# Altium PCB ISD1820PY 10秒录音器电路图.PcbDoc
Units mil, origin at the board's own origin, x right, y up, seen from the top; angles counter-clockwise.
Board outline 1575 x 1180 mil, 2 copper layers (Top Layer, Bottom Layer); 19 components, 17 nets, 62 pads, 1 vias.
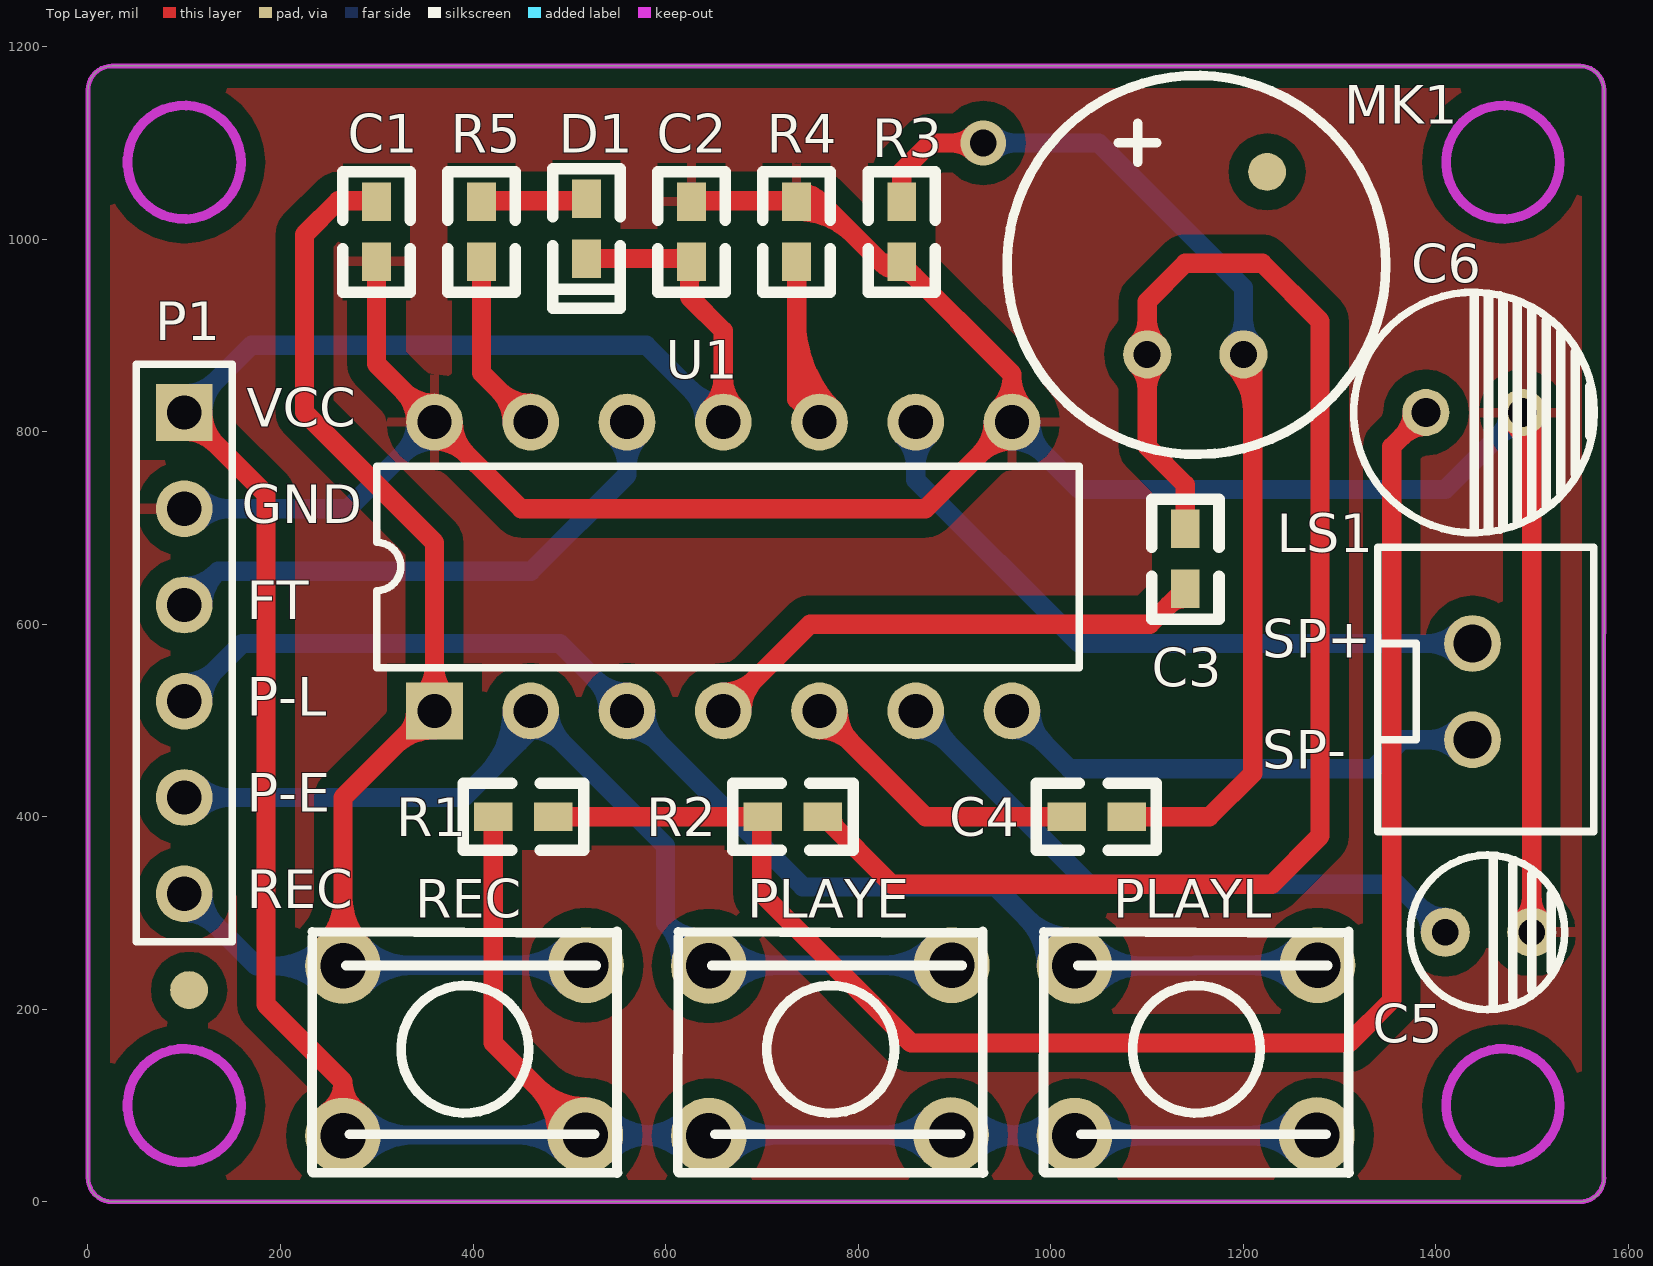
[diagram p0: Top Layer view]
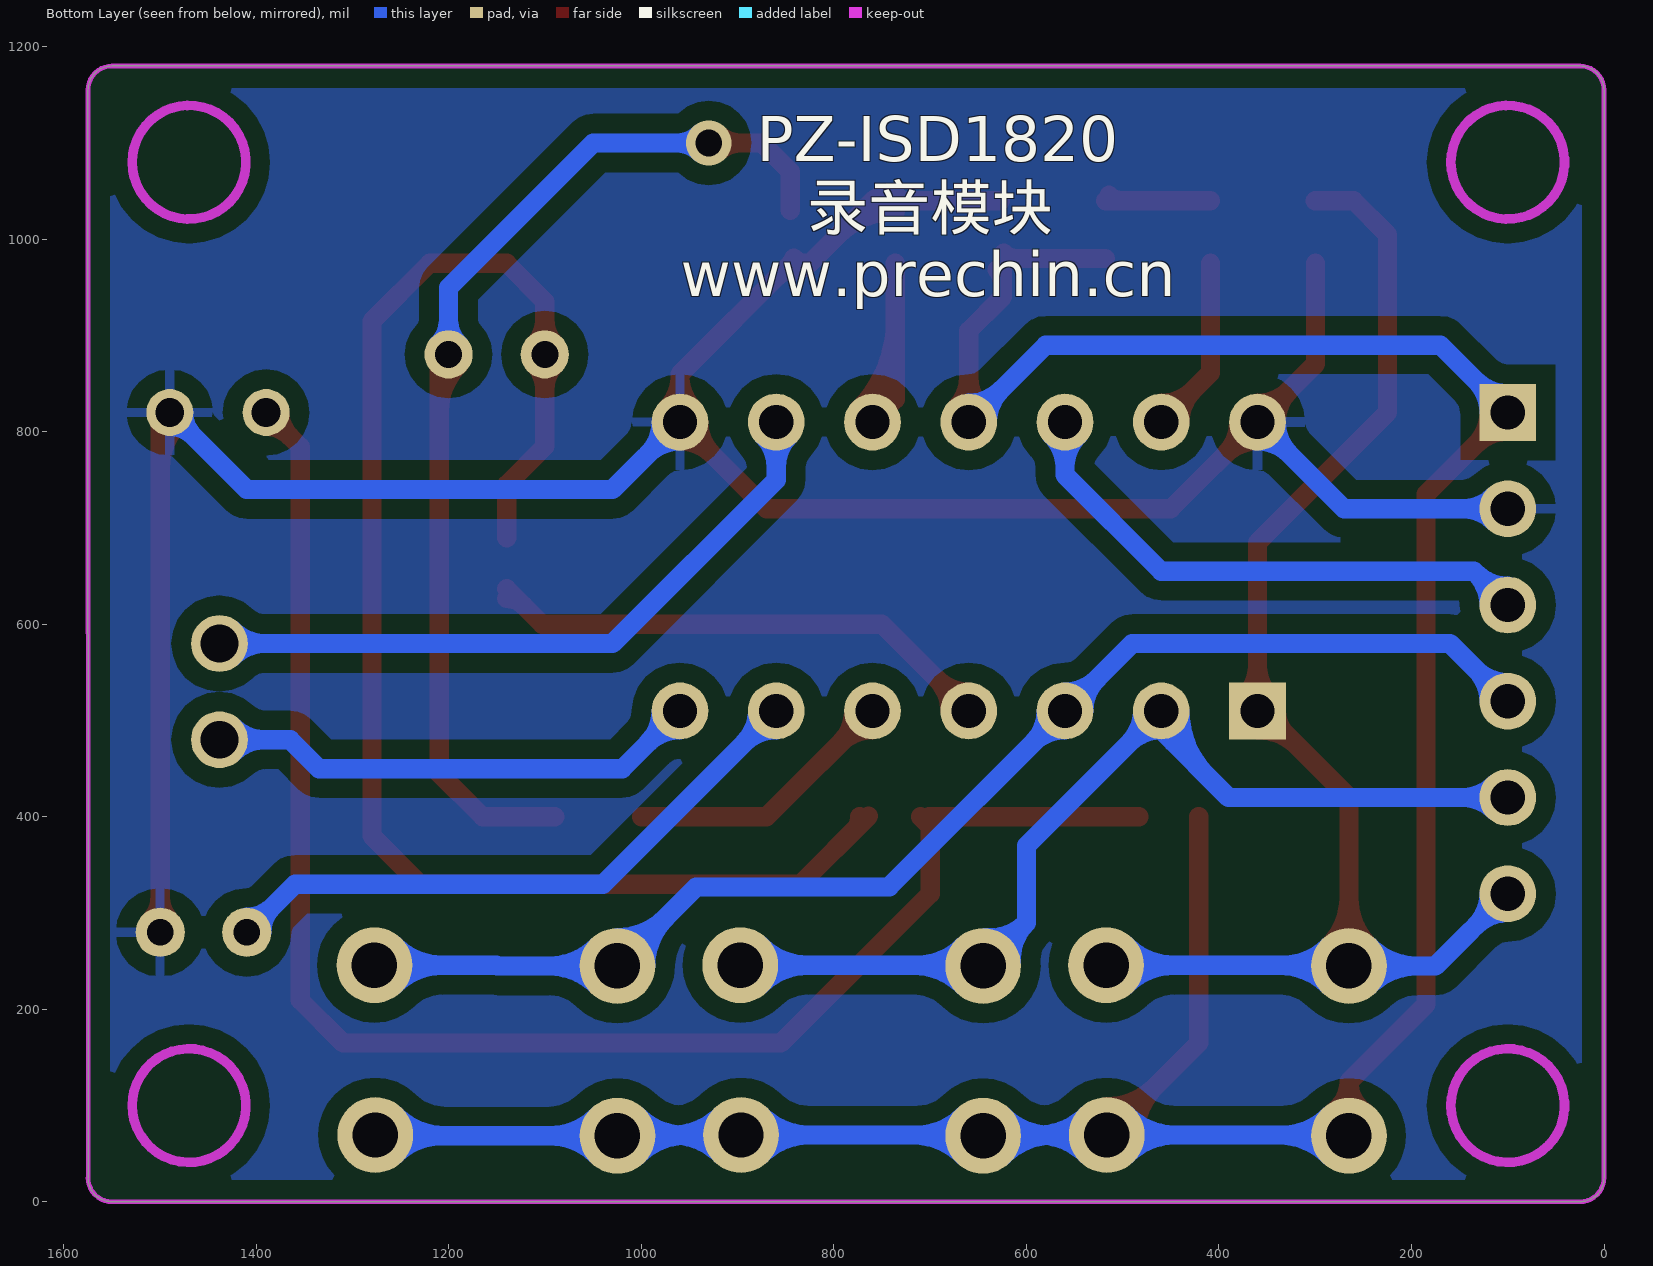
[diagram p1: Bottom Layer view, seen from below]

## Layer stack, top to bottom
Top Layer: signal copper 1.4
Dielectric: dielectric 12.6, FR-4, Dk 4.8
Bottom Layer: signal copper 1.4

## Board outline
25,0 cw(c25,25) 0,25 0,1155 cw(c25,1155) 25,1180 1550,1180 cw(c1550,1155) 1575,1155 1574.8,25 1575,25 cw(c1550,25) 1550,0

## Design rules (kind name [scope] priority, off if disabled: settings)
Clearance [All] p1: gap=20
ComponentClearance [All] p1: gap=0 collisioncheckmode=3 verticalgap=10 showdistances=FALSE
HoleToHoleClearance [All] p1: gap=0 allowstackedmicrovias=TRUE
MinimumSolderMaskSliver [All] p1: minsoldermaskwidth=0
PolygonConnect [All] p1: connectstyle=Relief reliefconductorwidth=10 reliefentries=4 polygonreliefangle="90 Angle"
RoutingVias [All] p1: holewidth=28 width=50 viastyle="Through Hole" minholewidth=28 minwidth=50 maxholewidth=28 maxwidth=50
SilkToSilkClearance [All] p1: silktosilkclearance=0
SilkscreenOverComponentPads [All] p1: minsilkscreentomaskgap=0
SolderMaskExpansion [All] p1: expansion=4
TestPointUsage [All] p1: valid=0 allowmultiple=FALSE
Testpoint [All] p1: side=15 testpointundercomponent=TRUE minsize=40 maxsize=100 preferedsize=60 minholesize=0 maxholesize=40 preferedholesize=32 testpointgrid=1 style=1023 order=0-112345678
Width [All] p1: maxlimit=50 minlimit=15 preferedwidth=20
19 further rules are at their usual default settings.

## Components (designator, comment, footprint, x,y, rotation, side; value= is the part's Value field where it differs from the comment)
C1 "Cap" 0603 299.62,980 r90 top
C2 "Cap" 0603 627.08,980 r90 top
C3 "Cap" 0603 1140,640 r90 top
C4 "Cap" 0603 1020,400 r0 top
C5 "Cap Pol2" CD4 1460,280 r180 top
C6 "Cap Pol2" CD6 1440,820 r90 top
D1 "LED" LED0603 517.92,980 r90 top
LS1 "Speaker" JXZ1 1340,680 r270 top
MK1 "Mic2" MIC 1100,880 r0 top
P1 "Header 6" HDR1X6 100,820 r270 top
PLAYE "JZ-SW2" JZ-SW2 645,245 r0 top (schematic designator K2)
PLAYL "JZ-SW2" JZ-SW2 1025,245 r0 top (schematic designator K3)
R1 "Res2" 0603 480,400 r180 top
R2 "Res2" 0603 760,400 r180 top
R3 "Res2" 0603 845.38,980 r90 top
R4 "Res2" 0603 736.23,980 r90 top
R5 "Res2" 0603 408.77,980 r90 top
REC "JZ-SW2" JZ-SW2 265,245 r0 top (schematic designator K1)
U1 "ISD1820" DIP-14 660,660 r0 top

## Footprints (in the part's own frame and the unit in brackets; to place one, negate y for a bottom-side part, rotate by r counter-clockwise, add the part's x,y. Pads: shape width x height; smd on the part's side, far side on the other; paste and mask are expansions set on the pad)
0603 [mil]
  rect 40x30 smd: 1(-3.15,0) 2(59.06,0)
  silkscreen extent -35,-35 90,35, body extent -41,-41 96,41, height 50
CD4 [mm]
  round 1.3 hole 0.7: 1(1.27,0) 2(-1.016,0)
  silkscreen extent -1.89,-2.04 2.19,2.04, body extent -1.99,-2.14 2.3,2.14, height 1.27
CD6 [mm]
  round 1.24 hole 0.762: 1(0,1.27) 2(0,-1.27)
  silkscreen extent -3.17,-3.17 3.17,3.17, body extent -2.62,-2.62 2.62,2.62, height 1.27
DIP-14 [mm] "DIP; 14 Leads; Row Spacing 7.62 mm; Pitch 2.54 mm"
  rect 1.5x1.5 hole 0.9: 1(-7.62,-3.81)
  round 1.5 hole 0.9: 2(-5.08,-3.81) 3(-2.54,-3.81) 4(0,-3.81) 5(2.54,-3.81) 6(5.08,-3.81) 7(7.62,-3.81) 8(7.62,3.81) 9(5.08,3.81) 10(2.54,3.81) 11(0,3.81) 12(-2.54,3.81) 13(-5.08,3.81) 14(-7.62,3.81)
  silkscreen extent -9.14,-2.67 9.4,2.65
HDR1X6 [mm] "Connector; Header; 6 Position"
  rect 1.5x1.5 hole 0.9: 1(0,0)
  round 1.5 hole 0.9: 2(2.54,0) 3(5.08,0) 4(7.62,0) 5(10.16,0) 6(12.7,0)
  silkscreen extent -1.27,-1.27 13.97,1.27
JXZ1 [mm]
  round 1.5 hole 1: 1(2.54,2.5) 2(5.08,2.5)
  silkscreen extent 0,0 7.5,5.7
JZ-SW2 [mm]
  round 2 hole 1.2: 1(0,0) 1(6.41,0.02) 2(0,-4.48) 2(6.39,-4.46)
  silkscreen extent -0.82,-5.46 7.25,0.92, body extent -1.1,-5.59 7.51,1.12, height 1.27
LED0603 [mil]
  rect 40x30 smd: A(0,0) K(62.2,0)
  silkscreen extent -52,-35 93,35
MIC [mil]
  round 50 hole 28: 1(0.42,0.29) 2(100.42,0.29)
  silkscreen extent -145,-104 248,290

## Part data
C1 C2 C3 C4: "Capacitor"
C5 C6: "Polarized Capacitor (Axial)"
LS1: "Loudspeaker"
MK1: "Microphone"
P1: "Header, 6-Pin"
R1 R2 R3 R4 R5: "Resistor"

## Free pads (board coordinates)
  round 39.37 smd: 0(105,220) 0(1225,1070)

## Via types
v1: diameter 47.24, hole 27.56, Top Layer to Bottom Layer, 1 vias

## Nets (pads, with @x,y where several pads share a name; then routed paths per layer and width w, separated by ;. In a path a pad name is that pad's centre, name@x,y a point inside that pad or via, vN(x,y) a via of type N, cw(c..) or ccw(c..) an arc to the next point about the centre after c; other vN are vias at no path point)
FT: P1.3 U1.12 | length 719
  Bottom Layer w20: P1.3 135,655 460,655 560,755 U1.12 ; P1.3@100,639.53 ccw(c100,686.67) 133.34,653.34 ccw(c166.67,620) P1.3@119.53,620 ; U1.12@546.19,796.19 cw(c512.86,762.86) 560,762.86 cw(c607.14,762.86) U1.12@573.81,796.19
GND: C1.1 C2.2 C5.2 C6.2 P1.2 R3.1 R4.2 U1.8 U1.14 | length 3623.3
  Top Layer w20: C1.1@299.62,975 299.62,870.38 U1.14 450,720 870,720 U1.8 960,860 845,975 825,975 760,1040 C2.2@626.92,1040 ; U1.14@340.47,810 ccw(c293.33,810) 326.66,843.34 ccw(c360,876.67) U1.14@360,829.53 ; U1.14@360,790.47 cw(c360,743.33) 393.34,776.66 cw(c426.67,810) U1.14@379.53,810 ; R4.2@736.23,1029.05 cw(c736.23,945.24) 795.49,1004.51 ; R4.2@736.23,1049.05 cw(c736.23,1013.53) 761.35,1038.65 ; R4.2@737.42,1039.2 cw(c745.6,1005.89) 769.86,1030.14 ; 824.5,975.5 ccw(c845.38,996.38) 845.38,966.85 cw(c845.38,948.1) R3.1@858.64,961.36 ; 828.85,975 ccw(c828.85,993.39) R3.1@841.85,980.39 ; U1.8@940.47,810 cw(c893.33,810) 926.66,776.66 cw(c960,743.33) U1.8@960,790.47 ; U1.8@946.19,823.81 ccw(c912.86,857.14) 960,857.14 ccw(c1007.14,857.14) U1.8@973.81,823.81 ; C6.2@1479.81,809.81 cw(c1431.07,761.07) 1500,761.07 ; C5.2@1488.98,291.02 ccw(c1462.36,317.64) 1500,317.64 ccw(c1537.64,317.64) C5.2@1511.02,291.02 ; C6.2 1500,810 C5.2
  Bottom Layer w20: P1.2 270,720 U1.14 ; P1.2@113.81,706.19 cw(c147.14,672.86) 147.14,720 cw(c147.14,767.14) P1.2@113.81,733.81 ; U1.14@340.47,810 cw(c293.33,810) 326.66,776.66 cw(c360,743.33) U1.14@360,790.47 ; U1.8@960,790.47 cw(c960,743.33) 993.34,776.66 cw(c1026.67,810) U1.8@979.53,810 ; U1.8 1030,740 1410,740 C6.2 ; C6.2@1475.59,820 cw(c1440.8,820) 1465.4,795.4 cw(c1490,770.8) C6.2@1490,805.59
NetC3_1: C3.1 U1.4 | length 625.6
  Top Layer w20: U1.4 750,600 1103.15,600 C3.1 ; U1.4@660,529.53 ccw(c660,576.67) 693.34,543.34 ccw(c726.67,510) U1.4@679.53,510 ; 1122.93,619.78 cw(c1140,602.71) C3.1@1140,626.85
NetC3_2: C3.2 MK1.1 R2.1 | length 1712.9
  Top Layer w20: R2.1@764.08,400.92 835,330 1230,330 1280,380 1280,915 1220,975 1140,975 1100.42,935.42 1100.42,784.58 1140,745 C3.2@1140,690 ; R2.1@773.15,400 ccw(c792.83,400) R2.1@778.91,386.09 ; MK1.1@1089.82,869.69 cw(c1064.21,844.08) 1100.42,844.08 cw(c1136.64,844.08) MK1.1@1111.03,869.69 ; MK1.1@1089.82,890.9 ccw(c1064.21,916.51) 1100.42,916.51 ccw(c1136.64,916.51) MK1.1@1111.03,890.9
NetC4_1: C4.1 U1.5 | length 359.6
  Top Layer w20: U1.5@760,490.47 cw(c760,443.33) 793.34,476.66 cw(c826.67,510) U1.5@779.53,510 ; U1.5 870,400 C4.1@1000,400
NetC4_2: C4.2 MK1.2 R3.2 | length 1318
  Top Layer w20: R3.2@845.38,1030 845.38,1070.38 875,1100 v1(930,1100) ; v1@920.37,1090.37 ccw(c897.11,1067.11) 897.11,1100 ccw(c897.11,1132.89) v1@920.37,1109.63 ; C4.2@1090,400 1165,400 1210,445 MK1.2@1210,870.72 ; MK1.2@1189.82,869.69 cw(c1141.09,820.96) 1210,820.96
  Bottom Layer w20: v1(930,1100) 1050,1100 1200.42,949.58 MK1.2 ; v1@939.63,1090.37 cw(c962.89,1067.11) 962.89,1100 cw(c962.89,1132.89) v1@939.63,1109.63 ; MK1.2@1189.82,890.9 ccw(c1164.21,916.51) 1200.42,916.51 ccw(c1236.64,916.51) MK1.2@1211.03,890.9
NetC5_1: C5.1 U1.6 | length 778.4
  Bottom Layer w20: U1.6@860,490.47 cw(c860,443.33) 893.34,476.66 cw(c926.67,510) U1.6@879.53,510 ; U1.6 1040,330 1360,330 C5.1 ; C5.1@1394.41,280 ccw(c1356.77,280) 1383.39,306.61 ccw(c1410,333.23) C5.1@1410,295.59
NetC6_1: C6.1 R1.1 R2.2 | length 1718.9
  Top Layer w20: R1.1 R2.2 ; R2.2@710,400 700,390 700,320 855,165 1310,165 1354.41,209.41 1354.41,784.41 C6.1 ; C6.1@1375.59,820 cw(c1340.8,820) 1365.4,795.4 cw(c1390,770.8) C6.1@1390,805.59
NetD1_K: D1.K R5.2 | length 124.5
  Top Layer w20: R5.2@408.77,1040 D1.K@517.92,1040 ; 500.53,1040 ccw(c500.53,1059.6) D1.K@514.39,1045.74
NetLS1_1: LS1.1 U1.9 | length 856.9
  Bottom Layer w20: U1.9@846.19,796.19 cw(c812.86,762.86) 860,762.86 cw(c907.14,762.86) U1.9@873.81,796.19 ; U1.9 860,750 1030,580 LS1.1 ; LS1.1@1424.62,566.19 ccw(c1391.28,532.86) 1391.28,580 ccw(c1391.28,627.14) LS1.1@1424.62,593.81
NetLS1_2: LS1.2 U1.7 | length 663.8
  Bottom Layer w20: U1.7@960,490.47 cw(c960,443.33) 993.34,476.66 cw(c1026.67,510) U1.7@979.53,510 ; U1.7 1020,450 1335,450 1365,480 LS1.2 ; LS1.2@1424.62,466.19 ccw(c1391.28,432.86) 1391.28,480 ccw(c1391.28,527.14) LS1.2@1424.62,493.81
NetR4_1: R4.1 U1.10 | length 338.5
  Top Layer w20: 736.23,866.25 ccw(c816.25,866.25) U1.10@759.67,809.67 ; 736.23,914.53 ccw(c864.53,914.53) U1.10@773.81,823.81 ; R4.1@736.23,975 736.23,833.77 U1.10
NetR5_1: R5.1 U1.13 | length 260.3
  Top Layer w20: R5.1@408.77,975 408.77,861.23 U1.13 ; U1.13@440.47,810 ccw(c393.33,810) 426.66,843.34 ccw(c460,876.67) U1.13@460,829.53
P-E: P1.5 PLAYE.1 U1.2 | length 1580
  Bottom Layer w20: P1.5 390,420 460,490 U1.2 600,370 600,290 ; P1.5@113.81,406.19 cw(c147.14,372.86) 147.14,420 cw(c147.14,467.14) P1.5@113.81,433.81 ; 412.52,442.52 ccw(c345.04,510) U1.2@440.47,510 ; 446.66,476.66 ccw(c413.33,510) U1.2@460.47,510 ; U1.2@460,490.47 cw(c460,443.33) 493.34,476.66 cw(c526.67,510) U1.2@479.53,510 ; PLAYE.1@615.72,247.33 ccw(c561.64,251.63) 600,290 ; PLAYE.1@642.67,274.28 cw(c638.37,328.36) 600,290 ; PLAYE.1@665.77,224.23 cw(c717.81,172.19) 717.81,245.79 ; PLAYE.1@665.77,265.77 ccw(c714,314) 714,245.79 ; PLAYE.1@876.59,225.02 ccw(c826.46,174.88) 826.46,245.79 ccw(c826.46,316.69) PLAYE.1@876.59,266.56 ; PLAYE.1@897.36,245.79 645.79,245.79 645,245 600,290
P-L: P1.4 PLAYL.1 U1.3 | length 1897.4
  Bottom Layer w20: P1.4 160,580 490,580 U1.3 742.5,327.5 ; P1.4@100,539.53 ccw(c100,586.67) 133.34,553.34 ccw(c166.67,520) P1.4@119.53,520 ; U1.3@540.47,510 ccw(c493.33,510) 526.66,543.34 ccw(c560,576.67) U1.3@560,529.53 ; U1.3@560,490.47 cw(c560,443.33) 593.34,476.66 cw(c626.67,510) U1.3@579.53,510 ; 742.5,327 943,327 1025,245 1150,245 1150.79,245.79 PLAYL.1@1277.36,245.79 ; PLAYL.1@995.63,245 ccw(c924.72,245) 974.86,295.14 ccw(c1025,345.28) PLAYL.1@1025,274.37 ; PLAYL.1@1045.77,224.23 cw(c1095.91,174.09) 1095.91,245 cw(c1095.91,315.91) PLAYL.1@1045.77,265.77 ; PLAYL.1@1256.59,225.02 ccw(c1206.46,174.88) 1206.46,245.79 ccw(c1206.46,316.69) PLAYL.1@1256.59,266.56
REC: C1.2 P1.6 REC.1 U1.1 | length 2100.9
  Top Layer w20: REC.1@244.23,265.77 ccw(c194.09,315.91) 265,315.91 ccw(c335.91,315.91) REC.1@285.77,265.77 ; REC.1@265,230 265,420 360,515 360,685 225,820 225,1005 260,1040 C1.2@300,1040 ; 318.13,473.13 cw(c360,431.26) U1.1@360,490.47 ; 330.2,485.2 ccw(c305.4,510) U1.1@340.47,510 ; U1.1@346.19,523.81 ccw(c312.86,557.14) 360,557.14 ccw(c407.14,557.14) U1.1@373.81,523.81
  Bottom Layer w20: P1.6@100,300.47 cw(c100,253.33) 133.34,286.66 cw(c166.67,320) P1.6@119.53,320 ; P1.6 175,245 215,245 ; 190,245 REC.1@265,245 ; REC.1@244.23,224.23 ccw(c194.09,174.09) 194.09,245 ccw(c194.09,315.91) REC.1@244.23,265.77 ; REC.1@265,245.79 REC.1@517.36,245.79 ; REC.1@285.77,224.23 cw(c337.81,172.19) 337.81,245.79 ; REC.1@285.77,265.77 ccw(c334,314) 334,245.79 ; REC.1@496.59,225.02 ccw(c446.46,174.88) 446.46,245.79 ccw(c446.46,316.69) REC.1@496.59,266.56
VCC: C2.1 D1.A P1.1 PLAYE.2 PLAYL.2 R1.2 REC.2 U1.11 | length 4755.9
  Top Layer w20: P1.1@100,800.47 cw(c100,753.33) 133.34,786.66 cw(c166.67,820) P1.1@119.53,820 ; P1.1 185,735 185,205 265,125 ; REC.2@248.17,92.69 ccw(c225.58,125) 265,125 ; REC.2@265,68.62 265,125 ; REC.2@281.83,92.69 cw(c304.42,125) 265,125 ; R1.2@421,400 421,164.99 REC.2@516.58,69.41 ; REC.2@487.21,69.41 ccw(c416.3,69.41) 466.44,119.55 ccw(c516.58,169.69) REC.2@516.58,98.78 ; D1.A 625,980 625,940 660,905 U1.11 U1.11@670,820 ; 610.54,980 ccw(c610.54,998.39) C2.1@623.54,985.39 ; 625,954.77 cw(c644.16,954.77) C2.1@630.61,968.31 ; U1.11@646.19,823.81 ccw(c612.86,857.14) 660,857.14 ccw(c707.14,857.14) U1.11@673.81,823.81
  Bottom Layer w20: P1.1 170,890 580,890 U1.11 ; P1.1@100,839.53 ccw(c100,886.67) 133.34,853.34 ccw(c166.67,820) P1.1@119.53,820 ; REC.2@265,69.41 516.58,69.41 645,69.41 896.58,69.41 PLAYL.2@1025,69.41 ; REC.2@285.77,47.85 cw(c337.81,-4.19) 337.81,69.41 ; REC.2@285.77,89.39 ccw(c334,137.63) 334,69.41 ; REC.2@495.81,48.64 ccw(c445.67,-1.5) 445.67,69.41 ccw(c445.67,140.32) REC.2@495.81,90.18 ; REC.2@537.34,48.64 cw(c587.48,-1.5) 587.48,69.41 cw(c587.48,140.32) REC.2@537.34,90.18 ; 572.19,69.41 cw(c572.19,-4.19) PLAYE.2@624.23,47.85 ; 576,69.41 ccw(c576,137.63) PLAYE.2@624.23,89.39 ; U1.11@640.47,810 ccw(c593.33,810) 626.66,843.34 ccw(c660,876.67) U1.11@660,829.53 ; PLAYE.2@665.77,47.85 cw(c717.81,-4.19) 717.81,69.41 ; PLAYE.2@665.77,89.39 ccw(c714,137.63) 714,69.41 ; PLAYE.2@875.81,48.64 ccw(c825.67,-1.5) 825.67,69.41 ccw(c825.67,140.32) PLAYE.2@875.81,90.18 ; PLAYE.2@917.34,48.64 cw(c967.48,-1.5) 967.48,69.41 cw(c967.48,140.32) PLAYE.2@917.34,90.18 ; 952.19,69.41 cw(c952.19,-4.19) PLAYL.2@1004.23,47.85 ; 956,69.41 ccw(c956,137.63) PLAYL.2@1004.23,89.39 ; PLAYL.2@1025,68.62 PLAYL.2@1276.58,68.62 ; PLAYL.2@1045.77,47.85 cw(c1095.91,-2.28) 1095.91,68.62 cw(c1095.91,139.53) PLAYL.2@1045.77,89.39 ; 1203.77,68.62 ccw(c1203.77,142.22) PLAYL.2@1255.81,90.18 ; 1207.57,68.62 cw(c1207.57,0.41) PLAYL.2@1255.81,48.64

## Polygon pours and split planes (outlines as drawn)
GND on Top Layer "Keep-Out Layer-No Net" (solid, remove dead copper, pour order 1000): 0,0 1575,0 1575,1180 0,1180
GND on Bottom Layer "Keep-Out Layer-No Net" (solid, remove dead copper, pour order 1001): 0,0 1575,0 1575,1180 0,1180

## Keep-outs
Keep-Out Layer:
  circle w10: c100,1080 r59.06
  circle w10: c1470,1080 r59.06
  circle w10: c1470,100 r59.06
  circle w10: c100,100 r59.06
  lines w5: 1574.8,25 1575,1155 ccw(c1550,1155) 1550,1180 25,1180 ccw(c25,1155) 0,1155 0,25 ccw(c25,25) 25,0 1550,0 ccw(c1550,25) 1575,25

## Silkscreen, mask and mechanical layers (free items; w line width, h text height)
Top Overlay:
  text "VCC" at 165,805 h40
  text "GND" at 160,705 h40
  text "FT" at 165,605 h40
  text "SP+" at 1220,565 h40
  text "P-L" at 165,505 h40
  text "SP-" at 1220,450 h40
  text "P-E" at 165,405 h40
  text "REC" at 165,305 h40
Bottom Overlay:
  text "PZ-ISD1820" at 880,1065.35 h80
  text "录音模块" at 827.87,994.88 h80
  text "www.prechin.cn" at 959.27,925.35 h80